# EAGLE board chcp_schematic (EAGLE 6.5.0)
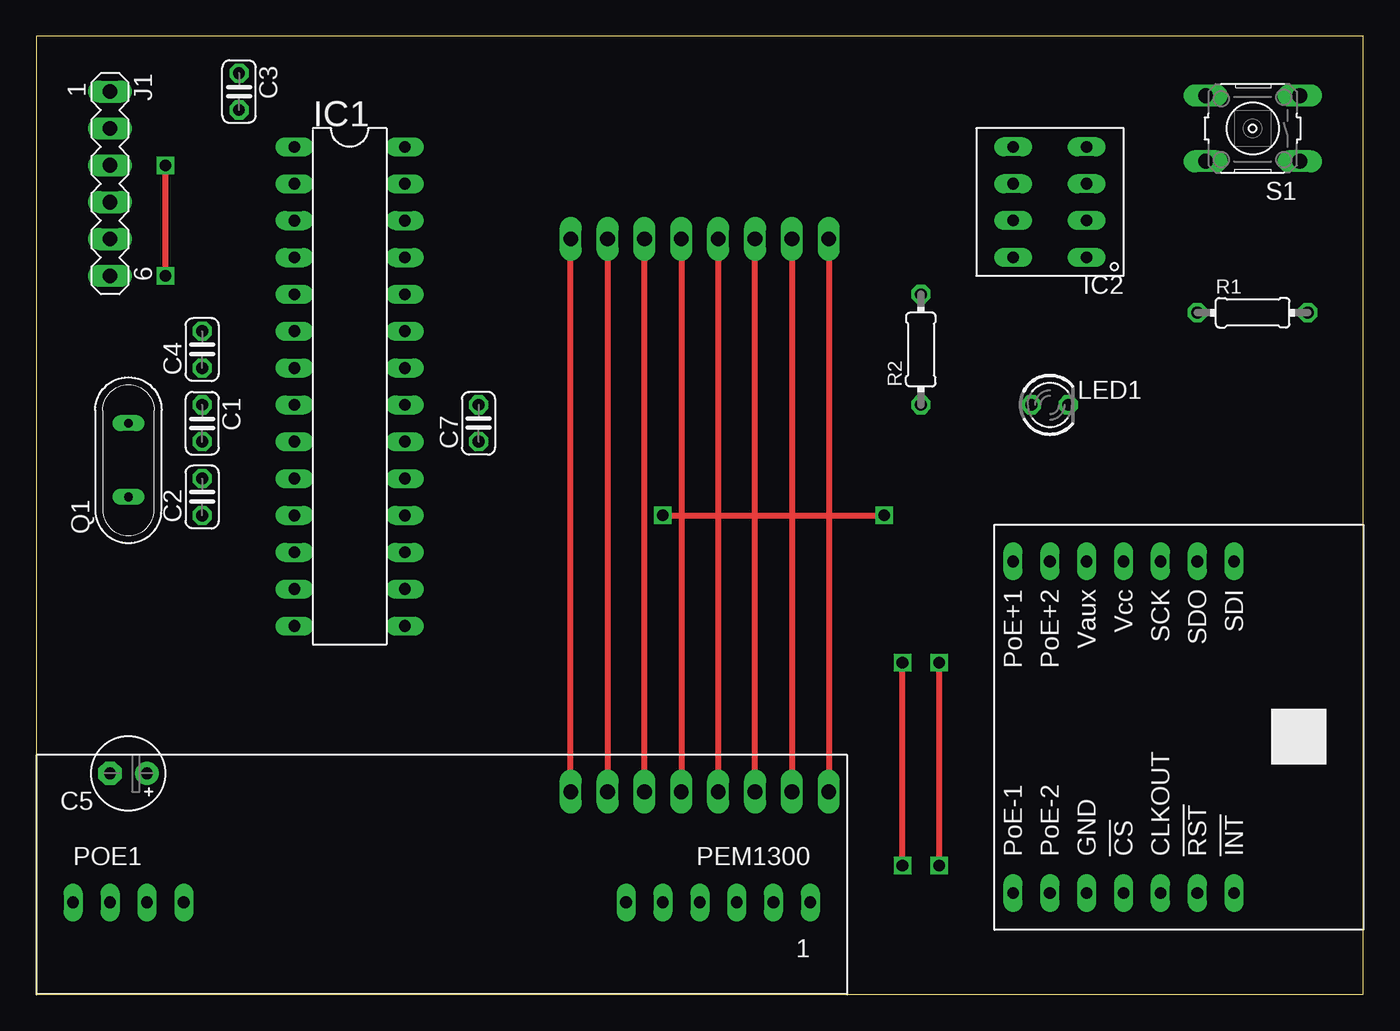
[diagram p0: board, top side]
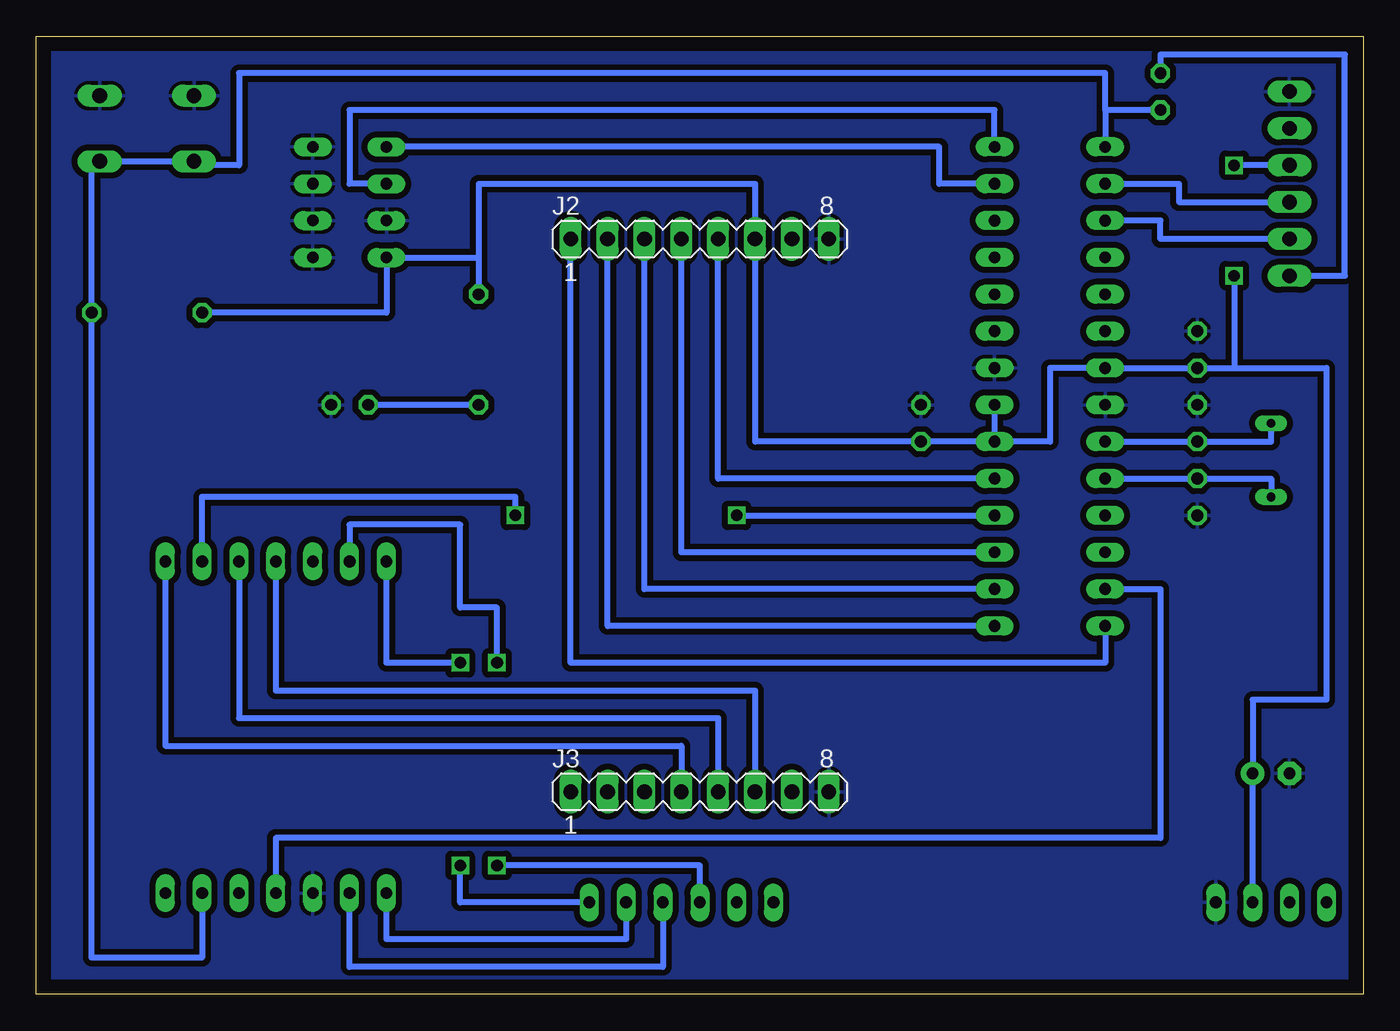
[diagram p1: board, bottom side, seen from below]

Size 91.44 x 66.04 mm. Coordinates in mm from the lower left corner, seen from the top.
Outline: 0,0 91.44,0 91.44,66.04 0,66.04 0,0
Copper layers (1*16): Top 0.035mm / dielectric 1.5mm / Bottom 0.035mm
Design rules "default *": minimum track width 10mil, minimum drill 24mil, track to track 8mil, track to pad 8mil, pad to pad 8mil, via to via 8mil, smd to smd 8mil, copper to edge 40mil, drill to drill 8mil, minimum pad ring 10mil, minimum via ring 8mil, stop-mask expansion 0mil, vias tented up to drill 0mil, thermal gap 10mil

## Footprints (pad centres in the part's own frame; a part is rotated, then mirrored left to right if it is on the bottom)
C025-024X044 = drill 0.813 octagon: 1 -1.27,0; 2 1.27,0
E2,5-5 = drill 0.813 pad 1.6: + -1.27,0 | drill 0.813 pad 1.6 octagon: - 1.27,0
DIL = drill 0.8 long: 1 -10.795,7.62; 2 -10.795,5.08; 3 -10.795,2.54; 4 -10.795,0; 5 -10.795,-2.54; 6 -10.795,-5.08; 7 -10.795,-7.62; 8 12.065,-7.62; 9 12.065,-5.08; 10 12.065,-2.54; 11 12.065,0; 12 12.065,2.54; 13 12.065,5.08; 14 12.065,7.62
DIL28-3 = drill 0.813 long: 1 -16.51,-3.81; 2 -13.97,-3.81; 3 -11.43,-3.81; 4 -8.89,-3.81; 5 -6.35,-3.81; 6 -3.81,-3.81; 7 -1.27,-3.81; 8 1.27,-3.81; 9 3.81,-3.81; 10 6.35,-3.81; 11 8.89,-3.81; 12 11.43,-3.81; 13 13.97,-3.81; 14 16.51,-3.81; 15 16.51,3.81; 16 13.97,3.81; 17 11.43,3.81; 18 8.89,3.81; 19 6.35,3.81; 20 3.81,3.81; 21 1.27,3.81; 22 -1.27,3.81; 23 -3.81,3.81; 24 -6.35,3.81; 25 -8.89,3.81; 26 -11.43,3.81; 27 -13.97,3.81; 28 -16.51,3.81
PDIP = drill 0.8 long: 1 -2.54,3.81; 2 -2.54,1.27; 3 -2.54,-1.27; 4 -2.54,-3.81; 5 2.54,-3.81; 6 2.54,-1.27; 7 2.54,1.27; 8 2.54,3.81
MA06-1 = drill 1.016 long: 1 -6.35,0; 2 -3.81,0; 3 -1.27,0; 4 1.27,0; 5 3.81,0; 6 6.35,0
MA08-1 = drill 1.016 long: 1 -8.89,0; 2 -6.35,0; 3 -3.81,0; 4 -1.27,0; 5 1.27,0; 6 3.81,0; 7 6.35,0; 8 8.89,0
LED3MM = drill 0.813 octagon: A -1.27,0; K 1.27,0
SIL = drill 0.8 long: 1 -25.4,0; 2 -22.86,0; 3 -20.32,0; 4 -17.78,0; 5 -15.24,0; 6 -12.7,0; 7 17.78,0; 8 20.32,0; 9 22.86,0; 10 25.4,0
QS = drill 0.61 long: 1 -2.54,0; 2 2.54,0
0204/7 = drill 0.813 octagon: 1 -3.81,0; 2 3.81,0
B3F-10XX = drill 1.016 long: 1 -3.251,2.261; 2 3.251,2.261; 3 -3.251,-2.261; 4 3.251,-2.261

## Placement (x,y rotation side)
C1  22pF  [C025-024X044]  11.43,39.37 270 top
C2  22pF  [C025-024X044]  11.43,34.29 90 top
C3  100nF  [C025-024X044]  13.97,62.23 270 top
C4  100nF  [C025-024X044]  11.43,44.45 90 top
C5  470uF  [E2,5-5]  6.35,15.24 180 top
C7  100nF  [C025-024X044]  30.48,39.37 90 top
ETH1  IN28J60  [DIL]  74.93,17.78 90 top
IC1  ATMEGA328-20P  [DIL28-3]  21.59,41.91 270 top
IC2  24MAC402  [PDIP]  69.85,54.61 180 top
J1  FTDI  [MA06-1]  5.08,55.88 270 top
J2  LCD1  [MA08-1]  45.72,52.07 0 bottom
J3  LCD2  [MA08-1]  45.72,13.97 0 bottom
LED1  GREEN  [LED3MM]  69.85,40.64 0 top
POE1  PEM1300  [SIL]  27.94,6.35 180 top
Q1  16 MHz  [QS]  6.35,36.83 90 top
R1  10K  [0204/7]  83.82,46.99 0 top
R2  56R  [0204/7]  60.96,44.45 90 top
S1  RESET  [B3F-10XX]  83.82,59.69 180 top

## Library data of the parts
C1-C5 C7 R1 R2 = rcl
ETH1 = in28j60
IC1 = atmega328
IC2 = at24mac402
J1-J3 = con-lstb; OC_FARNELL: unknown; OC_NEWARK: unknown
LED1 = led
POE1 = pem1300; MPN: PEM1303; OC_FARNELL: 1902523
Q1 = special
S1 = switch-omron; MPN: B3F-1000; OC_FARNELL: 176432; OC_NEWARK: 36M3542

## Nets
+3V3: C4.1 C5.+ C7.1 ETH1.11 IC1.7 IC1.20 IC1.21 IC2.8 J1.3 J2.6 J3.6 POE1.8 R1.1 R2.2
EN-SS: ETH1.4 IC1.13
GND: C1.1 C2.1 C4.2 C5.- C7.2 ETH1.3 IC1.8 IC1.22 IC2.1 IC2.2 IC2.3 IC2.4 IC2.7 J1.1 J2.8 J3.8 LED1.K POE1.7 S1.3 S1.4
LCD-DC: IC1.16 J2.3 J3.3
LCD-LIGHT: J2.7 J3.7
LCD-RESET: IC1.14 J2.1 J3.1
LCD-SS: IC1.15 J2.2 J3.2
MISO: ETH1.9 IC1.18
MOSI: ETH1.8 IC1.17 J2.4 J3.4
N$1: C2.2 IC1.10 Q1.1
N$2: IC1.27 IC2.5
N$3: IC1.28 IC2.6
N$5: C3.1 J1.6
N$6: C1.2 IC1.9 Q1.2
N$8: LED1.A R2.1
POE+1: ETH1.14 POE1.1
POE+2: ETH1.13 POE1.4
POE-1: ETH1.1 POE1.2
POE-2: ETH1.2 POE1.3
RESET: C3.2 ETH1.6 IC1.1 R1.2 S1.1 S1.2
RXD: IC1.2 J1.4
SCLK: ETH1.10 IC1.19 J2.5 J3.5
TXD: IC1.3 J1.5

## Tracks (layer width: path | path; a pad name or v marks a point on that pad's centre or on a via)
+3V3  (via drill 0.8)
  Top 0.406: J3.6 J2.6 | v8.89,57.15 v8.89,49.53
  Bottom 0.406: POE1.8 C5.+ 7.62,20.32 2.54,20.32 2.54,43.18 8.89,43.18 | 8.89,43.18 C4.1 IC1.7 21.59,43.18 21.59,38.1 IC1.20 | ETH1.11 74.93,20.95 41.91,20.95 J3.6 | J1.3 v8.89,57.15 | v8.89,49.53 8.89,43.18 | R1.1 67.31,46.99 IC2.8 60.96,50.8 | IC1.21 IC1.20 | IC1.20 C7.1 41.91,38.1 J2.6 41.91,55.88 60.96,55.88 60.96,50.8 | 60.96,50.8 R2.2
EN-SS
  Bottom 0.406: IC1.13 13.97,27.94 13.97,10.79 74.93,10.79 ETH1.4
GND
  Top 0.406: J3.8 J2.8
  pour Bottom (isolate 0.406): 0,0 0,66.04 91.44,66.04 91.44,0
LCD-DC
  Top 0.406: J3.3 J2.3
  Bottom 0.406: IC1.16 49.53,27.94 J2.3
LCD-LIGHT
  Top 0.406: J2.7 J3.7
LCD-RESET
  Top 0.406: J2.1 J3.1
  Bottom 0.406: IC1.14 17.78,22.86 54.61,22.86 J2.1
LCD-SS
  Top 0.406: J2.2 J3.2
  Bottom 0.406: IC1.15 52.07,25.4 J2.2
MISO  (via drill 0.8)
  Top 0.406: v43.18,33.02 v58.42,33.02
  Bottom 0.406: ETH1.9 80.01,34.29 58.42,34.29 v58.42,33.02 | v43.18,33.02 IC1.18
MOSI
  Top 0.406: J2.4 J3.4
  Bottom 0.406: IC1.17 46.99,30.48 J2.4 | ETH1.8 82.55,17.14 46.99,17.14 J3.4
N$1
  Bottom 0.406: IC1.10 C2.2 6.35,35.56 Q1.1
N$2
  Bottom 0.406: IC1.27 29.21,55.88 29.21,58.42 IC2.5
N$3
  Bottom 0.406: IC1.28 25.4,60.96 69.85,60.96 69.85,55.88 IC2.6
N$5
  Bottom 0.406: J1.6 1.27,49.53 1.27,64.77 13.97,64.77 C3.1
N$6
  Bottom 0.406: IC1.9 C1.2 6.35,38.1 Q1.2
N$8
  Bottom 0.406: R2.1 LED1.A
POE+1  (via drill 0.8)
  Top 0.406: v62.23,8.89 v62.23,22.86
  Bottom 0.406: POE1.1 62.23,6.35 v62.23,8.89 | v62.23,22.86 67.31,22.86 ETH1.14
POE+2  (via drill 0.8)
  Top 0.406: v59.69,8.89 v59.69,22.86
  Bottom 0.406: POE1.4 45.72,8.89 v59.69,8.89 | v59.69,22.86 59.69,26.67 62.23,26.67 62.23,32.38 69.85,32.38 ETH1.13
POE-1
  Bottom 0.406: POE1.2 50.8,3.81 67.31,3.81 ETH1.1
POE-2
  Bottom 0.406: POE1.3 48.26,1.91 69.85,1.91 ETH1.2
RESET
  Bottom 0.406: C3.2 17.78,60.96 | 17.78,60.96 IC1.1 | ETH1.6 80.01,2.54 87.63,2.54 R1.2 87.63,57.43 S1.1 S1.2 80.57,57.15 77.47,57.15 77.47,63.5 17.78,63.5 17.78,60.96
RXD
  Bottom 0.406: IC1.2 12.7,55.88 12.7,54.61 J1.4
SCLK
  Top 0.406: J2.5 J3.5
  Bottom 0.406: ETH1.10 77.47,19.05 44.45,19.05 J3.5 | IC1.19 44.45,35.56 J2.5
TXD
  Bottom 0.406: J1.5 13.97,52.07 13.97,53.34 IC1.3